# EAGLE board thermoregulation_driver (EAGLE 9.7.0)
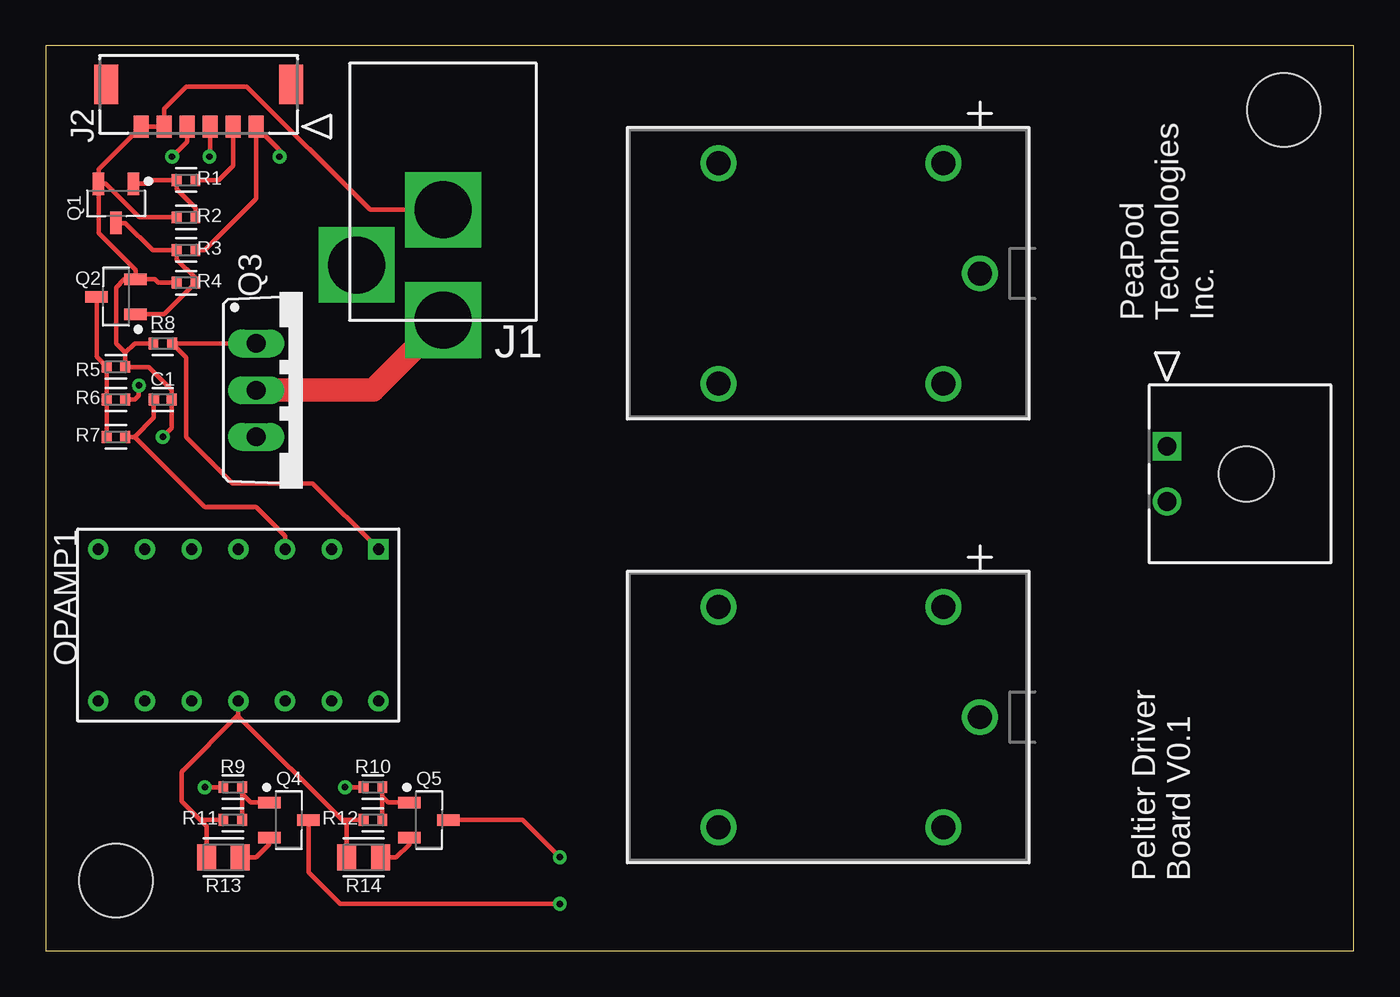
[diagram p0: board, top side]
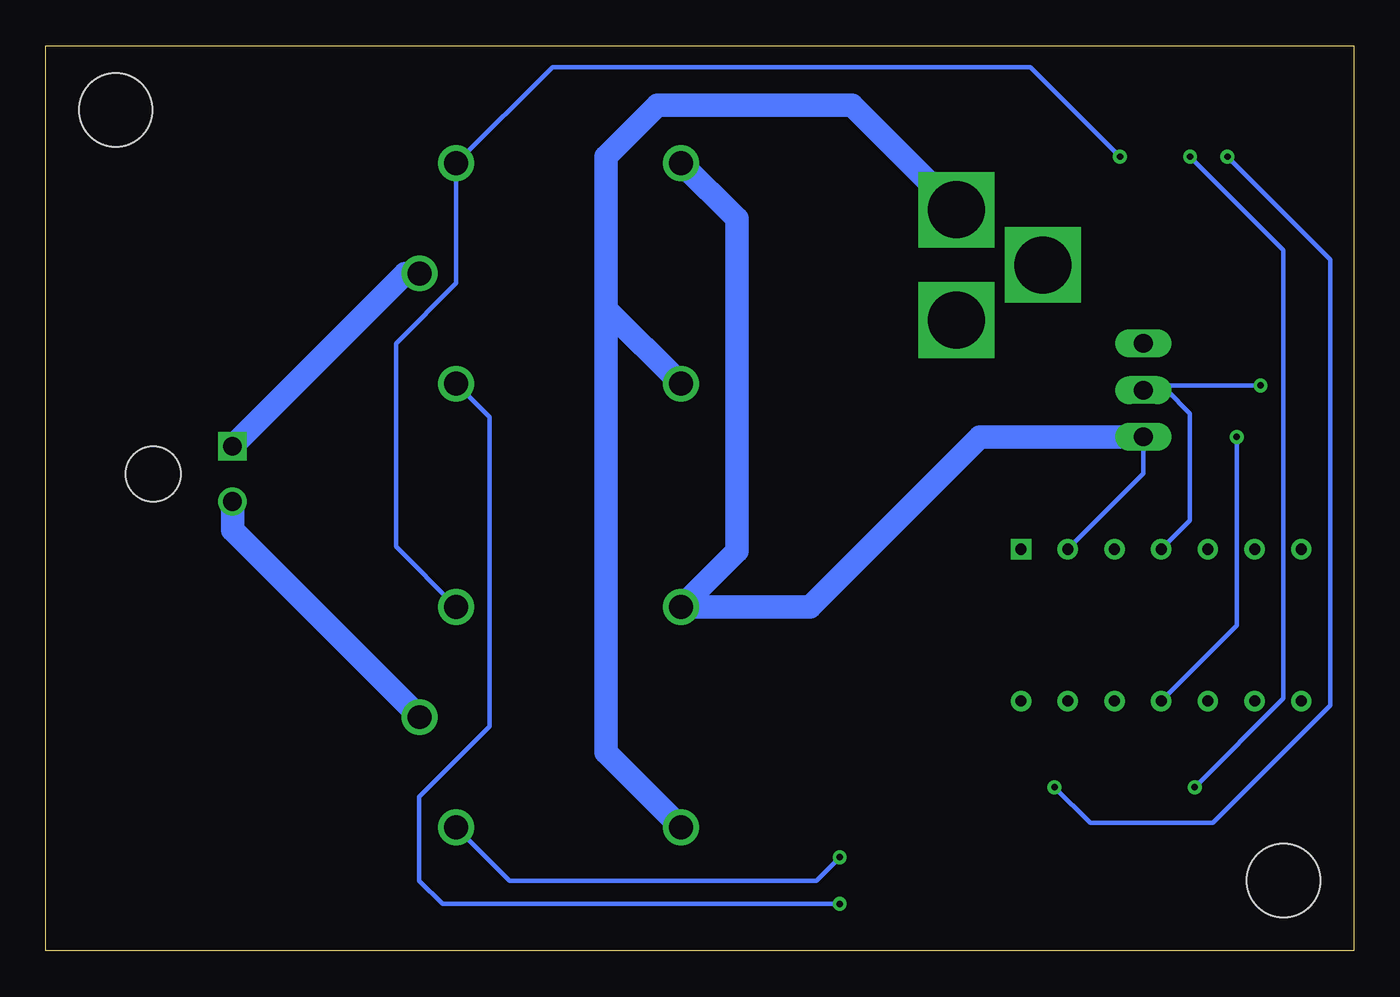
[diagram p1: board, bottom side, seen from below]

Size 71.1 x 49.2 mm. Coordinates in mm from the lower left corner, seen from the top.
Outline: 0,0 71.1,0 71.1,49.2 0,49.2 0,0
Copper layers (1*16): Top 0.035mm / dielectric 1.5mm / Bottom 0.035mm
Design rules "default": minimum track width 6mil, minimum drill 0.35mm, track to track 6mil, track to pad 6mil, pad to pad 6mil, via to via 6mil, smd to smd 6mil, copper to edge 40mil, drill to drill 6mil, minimum pad ring 10mil, minimum via ring 8mil, stop-mask expansion 4mil, vias tented up to drill 0mil, thermal gap 10mil
Holes 4 mm at 3.81,3.81 67.31,45.72

## Footprints (pad centres in the part's own frame; a part is rotated, then mirrored left to right if it is on the bottom)
CAPC1005X60 = smd 0.56 x 0.629: 1 -0.485,0; 2 0.485,0
DCBARRELJACK = drill 3.1 square: P$1 0,0; P$2 -3,-4.7; P$3 -6,0
CON_5055670671 = smd 0.8 x 1.2: 1 0,0; 2 -1.25,0; 3 -2.5,0; 4 -3.75,0; 5 -5,0; 6 -6.25,0 | smd 1.3 x 2.15: NC1 -8.15,2.295; NC2 1.9,2.295
CON_436500201_MOL = drill 1.02 pad 1.52 square: 1 0,0 | drill 1.02 pad 1.52: 2 -3,0 | hole 2.997: -1.499,-4.318
RELAY_G5LE-1_DC5_OMR = drill 1.3 pad 1.808: 1 0,16.5; 2 -6,14.5; 3 -6,2.278; 4 6,2.278; 5 6,14.5
LM324N = drill 0.6: 1IN+ 0,-5.08; 1IN- 0,-2.54; 2IN+ 0,-10.16; 2IN- 0,-12.7; 2OUT 0,-15.24; 3IN+ 8.255,-10.16; 3IN- 8.255,-12.7; 3OUT 8.255,-15.24; 4IN+ 8.255,-5.08; 4IN- 8.255,-2.54; 4OUT 8.255,0; GND 8.255,-7.62; VCC 0,-7.62 | drill 0.6 square: 1OUT 0,0
SOT95P237X112-3N = smd 1.224 x 0.625: 1 -1.064,0.95; 2 -1.064,-0.95; 3 1.064,0
TO220 = drill 1.016 long: B -2.54,0; C 0,0; E 2.54,0
RESC1005X40 = smd 0.535 x 0.644: 1 -0.507,0; 2 0.507,0
RESC2012X65 = smd 1.031 x 1.42: 1 -0.919,0; 2 0.919,0

## Placement (x,y rotation side)
C1  100nF  [CAPC1005X60]  6.35,29.97 0 top
J1  DCBARRELJACK  [DCBARRELJACK]  21.59,34.29 270 top
J2  MOLEX-MICROLOCK-6PIN  [CON_5055670671]  11.43,44.81 0 top
J3  436500201CON_436500201_MOL  [CON_436500201_MOL]  60.96,27.43 90 top
K1  G5LE-14_DC12RELAY_G5LE-1_DC5_OMR  [RELAY_G5LE-1_DC5_OMR]  34.29,36.83 270 top
K2  G5LE-14_DC12RELAY_G5LE-1_DC5_OMR  [RELAY_G5LE-1_DC5_OMR]  34.29,12.7 270 top
OPAMP1  LM324N  [LM324N]  18.08,21.83 270 top
Q1  NPN  [SOT95P237X112-3N]  3.81,40.64 270 top
Q2  MMBT2222A-7-F  [SOT95P237X112-3N]  3.81,35.56 180 top
Q3  2N6388G  [TO220]  11.43,30.48 270 top
Q4  NPN  [SOT95P237X112-3N]  13.21,7.11 0 top
Q5  NPN  [SOT95P237X112-3N]  20.83,7.11 0 top
R1  1k  [RESC1005X40]  7.62,41.91 0 top
R2  10k  [RESC1005X40]  7.62,39.88 0 top
R3  1k  [RESC1005X40]  7.62,38.1 0 top
R4  10k  [RESC1005X40]  7.62,36.32 0 top
R5  200k  [RESC1005X40]  3.81,31.75 180 top
R6  100k  [RESC1005X40]  3.81,29.97 0 top
R7  1.6M  [RESC1005X40]  3.81,27.94 0 top
R8  10k  [RESC1005X40]  6.35,33.02 0 top
R9  1k  [RESC1005X40]  10.16,8.89 0 top
R10  1k  [RESC1005X40]  17.78,8.89 0 top
R11  10k  [RESC1005X40]  10.16,7.11 0 top
R12  10k  [RESC1005X40]  17.78,7.11 0 top
R13  20  [RESC2012X65]  9.65,5.08 0 top
R14  20  [RESC2012X65]  17.27,5.08 0 top

## Library data of the parts
C1 = Capacitor; CATEGORY: Capacitor
J1 = DC Barrel Jack (Locking)
J2 = Molex Micro-Lock PLUS 6-Pin 90deg
J3 = Molex Micro-Fit 2-Pin 90deg; COPYRIGHT: Copyright (C) 2022 Ultra Librarian. All rights reserved.; MANUFACTURER_PART_NUMBER: 436500201; MFR_NAME: Molex Connector Corporation
K1 K2 = G5LE-14 DC3; COPYRIGHT: Copyright (C) 2022 Ultra Librarian. All rights reserved.; MANUFACTURER_PART_NUMBER: G5LE-14 DC12; MFR_NAME: Omron
OPAMP1 = LM324N
Q1 Q2 Q4 Q5 = Transistor; CATEGORY: Transistor; SUB-CATEGORY: BJT; TYPE: NPN
Q3 = 2N6388G
R1-R14 = Resistor; CATEGORY: Resistor; SUB-CATEGORY: Fixed

## Nets
+5V: J2.1 K1.2 K2.2 R3.2
+24V: J1.P$1 OPAMP1.VCC Q3.C R6.2
C1: J2.3 R9.1
C2: J2.4 R10.1
GND: C1.2 J1.P$3 J2.5 J2.6 K1.4 K2.4 OPAMP1.GND Q1.2 Q2.2 R2.1 R4.1 R5.1 R8.1 R11.1 R12.1 R13.1 R14.1
N$1: Q2.3 R5.2 R6.1 R7.1
N$2: Q1.3 Q2.1 R3.1 R4.2
N$3: C1.1 OPAMP1.1IN+ R7.2
N$4: OPAMP1.1OUT Q3.B R8.2
N$5: Q1.1 R1.1 R2.2
N$6: K1.3 K2.3 OPAMP1.1IN- Q3.E
N$7: J3.1 K1.1
N$8: J3.2 K2.1
N$9: K1.5 Q4.3
N$10: K2.5 Q5.3
N$11: Q4.1 R9.2 R11.2
N$12: Q5.1 R10.2 R12.2
N$13: Q4.2 R13.2
N$14: Q5.2 R14.2
PWM: J2.2 R1.2

## Tracks (layer width: path | path; a pad name or v marks a point on that pad's centre or on a via)
+5V  (via drill 0.35)
  Top 0.254: R3.2 8.64,38.1 11.43,40.9 J2.1 12.7,43.54 v12.7,43.18
  Bottom 0.254: v12.7,43.18 17.58,48.06 43.56,48.06 K1.2 48.79,36.3 52.07,33.02 52.07,21.98 K2.2
+24V  (via drill 0.35)
  Top 0.254: R6.2 4.83,29.97 5.06,30.2 v5.06,30.73
  Top 1.27: J1.P$1 17.78,30.48 Q3.C
  Bottom 0.254: Q3.C 10.16,30.48 | v5.06,30.73 10.41,30.73 10.16,30.48 | OPAMP1.VCC 8.89,23.4 8.89,29.21 10.16,30.48
C1  (via drill 0.35)
  Top 0.254: J2.3 8.93,43.22 v8.89,43.18 | R9.1 v8.64,8.89
  Bottom 0.254: v8.89,43.18 3.81,38.1 3.81,13.72 v8.64,8.89
C2  (via drill 0.35)
  Top 0.254: J2.4 7.68,44 v6.86,43.18 | R10.1 v16.26,8.89
  Bottom 0.254: v6.86,43.18 1.27,37.59 1.27,13.34 7.65,6.95 14.32,6.95 v16.26,8.89
GND  (via drill 0.35)
  Top 0.254: Q1.2 2.86,42.49 J2.6 J2.5 6.43,45.8 7.62,46.99 10.92,46.99 17.62,40.29 J1.P$3 | R2.1 5.08,39.88 3.25,41.7 Q1.2 | Q2.2 5.91,36.51 6.1,36.32 R4.1 | Q1.2 2.86,39.03 4.87,37.02 Q2.2 | Q2.2 4.25,36.51 3.81,36.07 3.81,33.02 4.32,32.51 | 4.32,32.51 R5.1 5.59,31.75 6.84,30.5 C1.2 6.84,28.43 v6.35,27.94 | R8.1 4.83,33.02 4.32,32.51 | R11.1 8.38,7.11 | 8.38,7.11 7.37,8.13 7.37,9.72 10.46,12.82 OPAMP1.GND 10.46,12.75 16.1,7.11 | R12.1 16.1,7.11 | R14.1 16.35,6.86 16.1,7.11 | R13.1 8.73,6.76 8.38,7.11
  Bottom 0.254: v6.35,27.94 6.35,17.69 OPAMP1.GND
  Bottom 1.27: K2.4 40.64,10.77 40.64,34.9 | J1.P$3 27.27,45.97 37.85,45.97 40.64,43.18 40.64,34.9 | 40.64,34.9 K1.4
N$1
  Top 0.254: Q2.3 2.75,32.31 R5.2 R6.1 R7.1
N$2
  Top 0.254: Q1.3 4.32,39.58 5.79,38.1 R3.1 7.11,37.59 8.13,36.58 R4.2 6.42,34.61 Q2.1
N$3
  Top 0.254: C1.1 5.87,28.98 4.83,27.94 | 4.83,27.94 R7.2 | 4.83,27.94 8.64,24.13 11.43,24.13 13,22.56 OPAMP1.1IN+
N$4
  Top 0.254: Q3.B R8.2 7.62,32.26 7.62,27.94 10.16,25.4 14.51,25.4 OPAMP1.1OUT
N$5
  Top 0.254: Q1.1 5.64,41.7 5.84,41.91 R1.1 7.11,41.4 8.13,40.39 R2.2
N$6
  Bottom 0.254: Q3.E 11.43,25.94 OPAMP1.1IN-
  Bottom 1.27: Q3.E 20.32,27.94 29.56,18.7 K2.3 33.54,21.73 33.54,39.8 K1.3
N$7
  Bottom 1.27: J3.1 51.56,36.83 K1.1
N$8
  Bottom 1.27: K2.1 60.96,22.87 J3.2
N$9  (via drill 0.35)
  Top 0.254: v27.94,2.54 16,2.54 14.27,4.27 Q4.3
  Bottom 0.254: v27.94,2.54 49.53,2.54 50.8,3.81 50.8,8.38 46.99,12.19 46.99,29.03 K1.5
N$10  (via drill 0.35)
  Top 0.254: Q5.3 25.91,7.11 v27.94,5.08
  Bottom 0.254: v27.94,5.08 29.21,3.81 45.9,3.81 K2.5
N$11
  Top 0.254: R11.2 R9.2 10.67,8.52 11.13,8.06 Q4.1
N$12
  Top 0.254: R12.2 R10.2 18.29,8.38 18.61,8.06 Q5.1
N$13
  Top 0.254: R13.2 11.43,5.08 12.14,5.79 Q4.2
N$14
  Top 0.254: R14.2 19.05,5.08 19.76,5.79 Q5.2
PWM
  Top 0.254: J2.2 10.18,42.69 9.4,41.91 R1.2

## Text on the board
tNames: PeaPod / Technologies / Inc. | Peltier Driver / Board V0.1